# Altium PCB OpenRing-V1R0-MainBoard.PcbDoc (part 3 of 3)
Units mm, origin at the board's own origin, x right, y up, seen from the top; angles counter-clockwise.
Board outline 50.5 x 8.5 mm, 4 copper layers (Top Layer, Layer 1, Layer 2, Bottom Layer), stack 0.148 mm thick; 74 components, 58 nets, 273 pads, 106 vias.
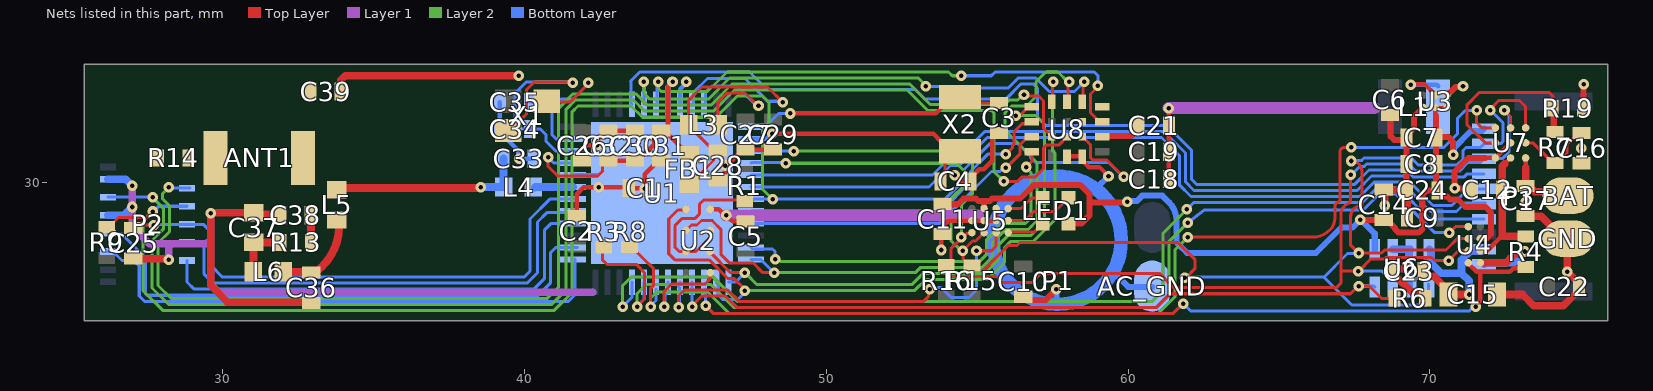
[diagram p4: the nets of this part, all layers, seen from the top]

## Via types
v1: diameter 0.35, hole 0.15, Top Layer to Bottom Layer, tented both sides, 106 vias

## Nets (pads, with @x,y where several pads share a name; then routed paths per layer and width w, separated by ;. In a path a pad name is that pad's centre, name@x,y a point inside that pad or via, vN(x,y) a via of type N, cw(c..) or ccw(c..) an arc to the next point about the centre after c; other vN are vias at no path point) (continued)
CHG_IRQ: R3.2 U1.20 U4.A1 | length 35.7
  Top Layer w0.1: R3.2@42.625,27.875 42.575,27.825 42.575,27.425 42.725,27.275 43.7,27.275 43.975,27 43.975,26.135 43.725,25.885 v1(43.725,25.875) ; v1(70.65,28.325) 70.85,28.525 U4.A1@71.275,28.525
  Layer 2 w0.1: v1(43.725,25.875) 43.725,26.3 44.025,26.6 46.175,26.6 46.925,25.85 60.925,25.85 61.35,26.275 61.35,28.025 v1(61.975,28.65)
  Bottom Layer w0.1: v1(43.725,25.875) v1@43.725,25.885 ; v1@43.725,25.9 43.74,25.9 43.95,26.11 U1.20@43.95,26.685 ; v1@61.977,28.652 62.516,29.075 62.551,29.075 67.791,29.075 67.82,29.104 68.316,29.6 68.885,29.6 70.16,28.325 v1(70.65,28.325)
GAUGE_IRQ: R8.2 U1.19 U7.A1 | length 37.4
  Top Layer w0.1: R8.2@43.535,27.865 43.9,27.5 44.275,27.125 44.275,26.584 44.175,26.484 v1(44.175,25.875) ; v1(61.975,28.175) 66.107,28.175 ccw(c66.108,29) 66.691,28.417 ccw(c66.308,28.8) 66.85,28.798 66.85,28.8 66.85,29.175 cw(c67.025,29.175) 66.962,29.338 ccw(c66.925,29.431) 67.015,29.388 67.025,29.409 67.025,31 cw(c67.175,31) 67.175,31.15 v1(67.4,31.15) ; v1@71.55,32.35 71.55,31.975 71.725,31.8 U7.A1@72.175,31.8 U7.A1@72.2,31.8
  Layer 2 w0.1: v1(44.175,25.875) 44.175,26.175 ; 44.2,26.175 44.375,26.35 46.075,26.35 46.775,25.65 61.008,25.65 61.55,26.192 61.55,27.75 v1(61.975,28.175)
  Bottom Layer w0.1: v1@44.192,25.892 v1(44.175,25.875) 44.175,25.9 44.35,26.075 U1.19@44.35,26.45 ; v1@67.39,31.15 v1(67.4,31.15) 70.462,31.15 70.925,31.613 70.925,32.125 71.175,32.375 v1(71.55,32.375)
GND: AC_GND.1 C1.2 C2.2 C3.2 C4.1 C5.1 C6.2 C7.1 C8.2 C9.2 C10.1 C11.2 C12.2 C14.1 C15.1 C16.2 C17.2 C18.1 C19.1 C21.2 C22.1 C23.1 C24.2 C25.1 C26.2 C27.2 C28.1 C29.2 C30.1 C31.1 C32.1 C33.2 C34.1 C35.1 C36.1 C37.1 C38.1 C39.2 GND.1 P1.2 P2.7 P2.11 P3.10 R6.1 R19.2 U1.32 U1.44 U1.49 U2.D1 U3.A1 U3.C2 U4.D2 U5.A3 U5.B1 U5.B2 U5.B3 U6.2 U6.3 U6.6 U7.B2 U7.C1 U8.6 U8.7 | length 106.8
  Top Layer w0.1: C16.2@75.025,30.625 v1@75.025,31.075
  Top Layer w0.15: C2.2@41.725,28.875 41.725,29.6 41.95,29.825 v1(42.45,29.825) 43.425,29.825 C1.2@43.45,29.8 v1@43.925,29.8 ; C26.2@41.9,30.71 41.9,31.125 42,31.225 v1(42.4,31.225) 42.438,31.263 42.438,31.473 42.65,31.685 C32.1@42.65,31.7 ; C32.1@42.76,31.71 C30.1@43.65,31.71 ; v1@43.975,29.8 43.975,30.26 44.425,30.71 C31.1@44.525,30.71 ; U2.D1@46.15,29.1 46.437,29.1 46.637,28.9 v1(46.675,28.9) 46.69,28.9 46.89,28.7 C5.1@47.275,28.7 ; C28.1@46.4,30.05 46.5,30.05 46.625,30.175 46.625,30.475 47.125,30.975 C27.2@47.125,31 ; C27.2@47.3,31.075 C27.2@47.313,31.088 ; C27.2@47.3,31.1 C27.2@47.313,31.088 ; C27.2@47.325,31.1 C27.2@47.313,31.088 ; C29.2@48.225,31.075 C27.2@47.325,31.075 C27.2@47.313,31.088 ; v1(53.8,27.75) 53.8,28.175 53.9,28.275 53.9,28.575 54.05,28.725 U5.B1@54.825,28.725 U5.B2@55.225,28.725 U5.B3@55.6,28.725 ; v1@54.25,30.275 54.25,30.231 54.456,30.025 C4.1@54.775,30.025 54.775,30.125 55.071,30.421 55.219,30.421 55.5,30.703 55.5,31.662 55.588,31.75 C3.2@55.703,31.75 ; U5.B3@55.625,28.725 U5.A3@55.625,29.125 ; U8.6@57.975,30.862 58.475,30.862 U8.7@58.475,30.837 58.475,30.724 58.7,30.5 59.05,30.5 v1(59.35,30.2) ; C18.1@61.35,30.1 C19.1@61.35,31 C21.2@61.35,31.875 v1(61.35,32.45) ; 71.85,30.8 U7.C1@72.175,30.8 ; U7.C1@72.2,30.825 U7.B2@72.675,31.3
  Top Layer w0.2: C10.1@56.525,26.1 57.275,26.1 v1(57.625,26.45) ; C6.2@68.7,32.075 68.7,31.517 68.817,31.4 C7.1@69.225,31.4 ; C24.2@69.225,29.75 C8.2@69.225,30.6 C7.1@69.225,31.4 ; U3.A1@69.775,32.475 69.775,32.461 69.475,32.161 69.475,31.792 69.358,31.675 69.325,31.675 69.225,31.575 C7.1@69.225,31.475 C7.1@69.225,31.4 ; U3.C2@70.575,32.875 70.846,33.146 71.071,33.146 v1(71.1,33.175) ; v1(70.825,29.8) 70.825,30.35 71.275,30.8 71.85,30.8 ; v1@70.832,29.793 71.3,29.793 C12.2@71.332,29.793 ; R19.2@75.085,32.45 75.092,32.457 75.092,33.242 v1(75.1,33.25)
  Top Layer w0.25: C25.1@27.025,27.475 27.037,27.463 28.135,27.463 28.173,27.425 v1(28.2,27.425) ; C38.1@31.9,28.9 31.86,28.94 31.035,28.94 30.997,28.978 29.603,28.978 v1(29.6,28.975) 29.6,26.575 30.15,26.025 32.9,26.025 C36.1@32.925,26 ; C39.2@33.9,33 33.9,33.379 34.046,33.525 v1(39.8,33.525) ; C14.1@68.475,29.75 68.475,29.7 68.5,29.675 v1(68.5,29.225) ; C14.1@68.587,29.737 68.69,29.737 68.781,29.737 C24.2@69.25,29.737 ; C23.1@68.725,27.15 68.744,27.131 69.281,27.131 v1(69.3,27.15) ; C23.1@68.823,26.927 68.875,26.875 69.1,26.65 69.123,26.65 69.473,26.3 69.775,26.3 69.85,26.225 R6.1@69.85,26.15 ; C9.2@69.25,28.825 C24.2@69.25,29.725 ; U4.D2@71.675,27.325 72.529,27.325 72.675,27.471 72.675,27.473 72.807,27.605 73.028,27.605 73.123,27.7 v1(73.15,27.7) ; C15.1@72.225,26.275 73.075,26.275 73.45,25.9 74.425,25.9 74.95,26.425 C22.1@74.95,26.525 ; C17.2@73.175,28.875 v1@73.175,29.325 ; C17.2@73.25,28.875 73.7,28.875 74.45,28.125 GND.1@74.525,28.125 ; GND.1@74.55,28.1 v1(74.55,27.025) C22.1@75,26.575
  Layer 1 w0.25: v1(27,29.875) v1(27,29.175) 27,28.5 27.55,27.95 28.2,27.95 ; v1(28.2,27.425) 28.2,27.95 ; v1(29.6,28.975) 29.6,28.096 ; 42.25,26.35 29.85,26.35 29.6,26.6 29.6,28.096 ; 28.2,27.95 29.454,27.95 29.6,28.096
  Layer 1 w0.4: v1(46.675,28.9) 55.025,28.9 ; v1@61.348,32.45 v1(61.35,32.45) 68.173,32.45
  Bottom Layer w0.15: C34.1@39.175,31.76 39.175,31.66 39.787,31.048 39.787,30.813 v1(39.825,30.775) C33.2@40.3,30.775 ; C34.1@39.175,31.825 C35.1@39.175,32.65 ; U1.32@41.6,30.235 42.415,30.235 U1.49@42.425,30.225 ; U1.44@45.15,32.585 45.15,33.08 45.35,33.28 v1@45.35,33.3
  Bottom Layer w0.2: 57.6,25.9 57.625,25.925 57.625,25.95 v1(57.625,26.45) ; v1(59.35,30.2) 58.967,29.817 58.967,29.743 58.967,29.651 59.4,29.218 ; 59.55,26.975 60,26.525 AC_GND.1@60.8,26.525
  Bottom Layer w0.25: P2.7@26.19,28.9 26.709,28.9 26.984,29.175 v1(27,29.175) ; P2.11@26.19,30.1 26.775,30.1 v1@26.975,29.9 ; U6.2@68.775,27.77 69.345,27.77 U6.3@69.35,27.775 ; v1@69.3,27.177 v1(69.3,27.15) 69.319,27.131 v1@69.319,27.102 ; U6.6@69.325,26.525 v1@69.325,27.047 ; v1@69.325,27.252 U6.3@69.325,27.75 ; P3.10@71.8,27.275 71.85,27.325 72.775,27.325 v1(73.15,27.7)
  other v1: 73.175,29.35 43.975,29.775 54.25,30.225 46.65,30.55 75.025,31.125 45.35,33.325
LED_EN: U1.17 U5.C3 | length 14.2
  Top Layer w0.1: v1(45.1,25.85) 45.1,26.225 45.3,26.425 46.733,26.425 47.108,26.05 53.225,26.05 53.377,26.202 53.377,26.402 v1(53.425,26.45) ; v1(54.975,27.725) 55.475,27.725 55.625,27.875 U5.C3@55.625,28.325
  Bottom Layer w0.1: v1(45.1,25.85) 45.125,25.875 45.125,26.5 U1.17@45.1,26.525 ; U1.17@45.125,26.66 U1.17@45.15,26.685 ; v1(53.425,26.45) 53.473,26.498 53.689,26.498 53.7,26.509 53.8,26.509 54.134,26.175 54.725,26.175 54.975,26.425 v1(54.975,27.725)
MCU_R\E\S\E\T\: C25.2 P2.6 U1.30 | length 18.1
  Top Layer w0.1: C25.2@27.025,28.4 27.2,28.575 v1(27.7,28.575)
  Bottom Layer w0.1: v1(27.7,28.575) 27.713,28.588 28.798,28.588 P2.6@28.81,28.6 29.35,28.6 29.575,28.375 29.575,27.258 29.983,26.85 39.975,26.85 40.175,27.05 40.175,28.775 40.835,29.435 U1.30@41.6,29.435
MCU_RX: P2.2 U1.28 | length 15.4
  Bottom Layer w0.1: P2.2@28.81,27.4 28.81,26.69 29.05,26.45 40.3,26.45 40.65,26.8 40.65,28.4 40.885,28.635 U1.28@41.6,28.635
MCU_SWD_CLK: P2.5 U1.26 | length 18.3
  Bottom Layer w0.1: P2.5@26.19,28.3 26.625,28.3 27.425,27.5 27.425,26.309 27.484,26.25 40.45,26.25 40.85,26.65 40.85,27.65 41.025,27.825 U1.26@41.75,27.825
MCU_SWD_IO: P2.3 U1.25 | length 18
  Bottom Layer w0.1: P2.3@26.19,27.7 26.35,27.7 26.65,27.4 26.874,27.4 27.049,27.4 27.225,27.224 27.225,27.049 27.225,26.226 27.401,26.05 41.45,26.05 41.675,26.275 U1.25@41.675,27.45
MCU_TX: P2.4 U1.29 | length 15.9
  Bottom Layer w0.1: P2.4@28.81,28 29.25,28 29.375,27.875 29.375,26.95 29.675,26.65 40.075,26.65 40.425,27 40.425,28.675 40.75,29 U1.29@41.625,29
MEM_SPI_C\S\: U1.18 U2.A1 | length 3.3
  Top Layer w0.1: v1(44.625,25.875) 44.625,26.375 44.875,26.625 45.975,26.625 46.135,26.785 46.135,26.96 U2.A1@46.175,27
  Bottom Layer w0.1: v1(44.625,25.875) 44.642,25.892 44.642,26.252 44.75,26.36 U1.18@44.75,26.685
MPU_CLK: U1.12 U2.C2 U8.13 | length 22.7
  Top Layer w0.1: U2.C2@45.35,28.4 45.527,28.577 45.71,28.577 45.858,28.725 46.225,28.725 46.225,28.714 46.5,28.439 46.5,27.605 46.78,27.325 47.57,27.325 47.895,27 v1(48.275,27) ; U8.13@57.975,32.687 58.013,32.724 58.013,33.288 v1(58.05,33.325)
  Layer 2 w0.1: v1(48.275,27) 52.95,27 53.125,27.175 55.167,27.175 55.5,27.508 55.5,27.992 55.933,28.425 56.683,28.425 56.984,28.726 56.984,30.651 55.925,31.71 55.925,32.31 56.14,32.525 56.635,32.525 56.95,32.84 56.95,33.325 57.275,33.65 57.675,33.65 58,33.325 v1(58.05,33.325)
  Bottom Layer w0.1: U1.12@47.5,27.435 47.825,27.435 48.26,27 v1(48.275,27)
MPU_CS#: U1.41 U8.12 | length 17.4
  Top Layer w0.1: U8.12@58.475,32.687 58.512,32.724 58.512,33.288 v1(58.55,33.325)
  Layer 2 w0.1: v1(43.95,33.325) 43.95,32.95 44.15,32.75 46.092,32.75 46.792,33.45 46.808,33.45 53.045,33.45 53.3,33.195 v1(53.3,33.175)
  Bottom Layer w0.1: U1.41@43.95,32.585 v1@43.95,33.4 ; v1(53.3,33.175) 53.8,33.175 53.85,33.125 56.033,33.125 56.358,33.45 56.94,33.45 57.39,33 58.225,33 v1(58.55,33.325)
MPU_GPIO0: U1.8 U8.2 | length 11
  Top Layer w0.1: v1(55.95,30.925) 56.173,31.148 56.173,31.223 56.225,31.275 56.225,31.675 56.485,31.935 56.76,31.935 U8.2@56.775,31.95 ; U8.2@56.775,32.025 U8.2@56.812,32.025
  Bottom Layer w0.1: U1.8@47.5,29.035 53.802,29.035 54.775,30.008 54.775,30.35 55.35,30.925 v1(55.95,30.925)
MPU_GPIO1: U1.9 U8.3 | length 10.7
  Top Layer w0.1: v1(55.95,30.475) 55.96,30.475 56.425,30.94 56.425,31.25 56.7,31.525 U8.3@56.812,31.525
  Bottom Layer w0.1: U1.9@47.5,28.635 53.76,28.635 55.475,30.35 55.757,30.35 55.882,30.475 v1(55.95,30.475)
MPU_GPIO2: U1.42 U8.10 | length 17.9
  Top Layer w0.1: v1(59,33.2) 59,33.169 58.751,32.919 58.751,32.3 59.026,32.025 U8.10@59.138,32.025
  Layer 2 w0.1: v1(44.425,33.325) 44.442,33.308 44.442,33.083 44.525,33 46.059,33 46.709,33.65 46.725,33.65 54.05,33.65 54.175,33.525 v1(54.475,33.525)
  Bottom Layer w0.1: U1.42@44.35,32.585 44.387,32.623 44.387,33.338 v1@44.425,33.375 ; v1(54.475,33.525) 55.467,33.525 55.592,33.65 58.875,33.65 59,33.525 v1(59,33.2)
MPU_GPIO3: U8.11
MPU_GPIO4: U8.18
MPU_IRQ#: U1.11 U8.4 | length 12.9
  Top Layer w0.1: v1(56.625,30.5) 56.812,30.688 U8.4@56.812,31.025
  Layer 2 w0.1: v1(48.3,27.45) 48.348,27.402 48.456,27.402 48.484,27.375 55.085,27.375 55.3,27.59 55.3,28.075 55.85,28.625 56.175,28.625 56.6,28.625 56.784,28.809 56.784,30.316 56.625,30.475 v1(56.625,30.5)
  Bottom Layer w0.1: U1.11@47.5,27.835 47.55,27.785 48.215,27.785 48.295,27.705 48.295,27.455 v1(48.3,27.45) ; v1@56.6,30.525 v1(56.625,30.5)
MPU_MISO: U1.13 U2.B1 U8.1 | length 18.3
  Top Layer w0.1: U2.B1@46.15,27.7 46.15,27.672 46.822,27 v1(47.3,27) ; v1(56.275,32.2) 56.323,32.248 56.447,32.248 56.7,32.5 U8.1@56.787,32.5
  Layer 2 w0.1: v1@47.3,26.975 47.325,26.975 47.7,26.6 52.833,26.6 53.208,26.975 55.25,26.975 55.7,27.425 55.7,27.909 56.016,28.225 56.341,28.225 56.766,28.225 57.225,28.684 57.225,29.108 57.225,31.925 56.95,32.2 v1(56.275,32.2)
  Bottom Layer w0.1: U1.13@46.75,26.685 46.985,26.685 v1(47.3,27)
MPU_MOSI: U1.14 U2.D2 U8.14 | length 23.3
  Top Layer w0.1: U2.D2@45.35,29.125 45.3,29.075 45.075,29.075 44.775,28.775 44.775,27.625 44.975,27.425 46.114,27.425 46.739,26.8 46.95,26.8 47.3,26.45 v1(47.3,26.4) ; U8.14@57.475,32.687 57.5,32.712 57.5,33.3 v1(57.525,33.325)
  Layer 2 w0.1: v1(47.3,26.4) 52.915,26.4 53.29,26.775 55.333,26.775 55.9,27.342 55.9,27.826 56.099,28.025 56.849,28.025 57.575,28.751 57.575,30.967 57.5,31.042 57.5,33.3 v1(57.525,33.325)
  Bottom Layer w0.1: U1.14@46.35,26.685 46.4,26.635 46.4,26.275 46.565,26.11 47.06,26.11 47.3,26.35 v1(47.3,26.4)
MPU_R\E\S\E\T\: P2.8 R9.2 U1.7 U8.17 | length 53
  Top Layer w0.1: R9.2@26.15,28.51 26.225,28.51 26.54,28.825 27.44,28.825 27.64,29.025 v1(27.675,29.025) ; U8.17@58.475,31.525 58.75,31.25 58.75,30.813 58.838,30.725 59.3,30.725 v1(59.85,30.175)
  Layer 2 w0.1: v1(27.675,29.025) 27.35,28.7 27.35,26.4 28,25.75 40.983,25.75 41.575,26.342 41.575,32.335 41.765,32.525 43.526,32.525 43.901,32.15 46.34,32.15 47.04,32.85 47.885,32.85 48.1,32.635 48.1,31.96 47.875,31.735 47.875,29.775 v1(48.225,29.425)
  Bottom Layer w0.1: v1(27.675,29.025) 27.7,29.025 27.875,29.2 P2.8@28.8,29.2 ; U1.7@47.5,29.435 47.549,29.386 47.597,29.435 53.92,29.435 54.385,29.9 54.575,30.09 54.575,30.433 55.417,31.275 56.36,31.275 56.76,30.875 56.76,30.825 56.935,30.65 59.36,30.65 59.835,30.175 v1(59.85,30.175)
MPU_SWD_CLK: P2.10 U8.15 | length 42.3
  Top Layer w0.1: v1(56.55,32.9) 56.598,32.852 57.034,32.852 57.2,32.687 57.2,32.425 ; 57.2,32.425 57.2,31.775 57.45,31.525 U8.15@57.475,31.525
  Layer 2 w0.1: v1(28.2,29.825) 28,29.625 28,29.442 28.225,29.217 28.225,28.358 27.85,27.983 27.85,26.575 28.275,26.15 40.75,26.15 41.125,26.525 41.125,32.45 41.6,32.925 43.692,32.925 44.067,32.55 46.175,32.55 46.875,33.25 52.765,33.25 53.44,32.575 55.908,32.575 56.058,32.725 56.341,32.725 56.516,32.9 v1(56.55,32.9)
  Bottom Layer w0.1: v1(28.2,29.825) 28.212,29.813 28.887,29.813 P2.10@28.9,29.8
MPU_SWD_DIO: P2.9 U8.16 | length 45.5
  Top Layer w0.1: v1(55.875,30.025) 56.34,30.025 56.49,30.175 56.925,30.175 57.2,30.45 57.2,31.136 57.288,31.225 57.7,31.225 U8.16@57.975,31.5
  Layer 2 w0.1: v1(27.675,29.5) 27.675,29.485 28.025,29.135 28.025,28.44 27.65,28.065 27.65,26.492 28.192,25.95 40.9,25.95 41.375,26.425 41.375,32.417 41.683,32.725 43.609,32.725 43.984,32.35 46.258,32.35 46.958,33.05 52.683,33.05 53.358,32.375 55.475,32.375 55.55,32.3 55.55,30.35 v1(55.875,30.025)
  Bottom Layer w0.1: P2.9@26.19,29.5 v1(27.675,29.5)
NetANT1_1: ANT1.1 C38.2 C39.1 R13.2 R14.1 | length 0.9
  Top Layer w0.265: R13.2@32.9,27.975 32.91,27.985 32.91,28.89 C38.2@32.9,28.9
NetANT1_2: ANT1.2 R14.2
NetC3_1: C3.1 U1.1 X2.2 | length 8.8
  Top Layer w0.1: X2.2@54.425,32.825 54.625,32.625 C3.1@55.831,32.625
  Top Layer w0.15: v1(48.8,32.275) 53.625,32.275 53.8,32.45 53.8,32.5 54,32.7 54.05,32.7 X2.2@54.05,33.075
  Bottom Layer w0.1: U1.1@47.5,31.835 47.975,31.835 48.415,32.275 v1(48.8,32.275)
NetC4_2: C4.2 U1.2 X2.1 | length 7.3
  Top Layer w0.1: C4.2@53.775,30.025 53.925,30.175 53.925,30.775 X2.1@53.875,30.825
  Top Layer w0.15: v1(48.2,31.6) 53.55,31.6 X2.1@53.775,31.375
  Bottom Layer w0.15: U1.2@47.5,31.435 48.02,31.435 48.185,31.6 v1(48.2,31.6)
NetC16_1: C16.1 R7.2 U7.B3 | length 2.7
  Top Layer w0.1: U7.B3@73.175,31.3 73.415,31.3 74.09,30.625 R7.2@74.15,30.625 ; R7.2@74.15,30.64 74.225,30.64 74.55,30.965 74.55,31.25 74.95,31.65 C16.1@75.025,31.65
NetC21_1: C21.1 U8.9 | length 1.2
  Top Layer w0.2: U8.9@59.138,31.525 60.1,31.525 60.25,31.675 C21.1@60.25,31.75
NetC28_2: C28.2 FB1.2 L3.1 U1.45 | length 10.9
  Top Layer w0.1: FB1.2@45.45,29.935 45.48,29.935 46.258,30.713 46.258,31.108 C28.2@46.275,31.125 ; C28.2@46.275,31.175 46.13,31.175 45.435,31.87 L3.1@45.435,31.9 45.435,32.71 45.875,33.15 48.05,33.15 v1(48.55,32.65)
  Bottom Layer w0.1: U1.45@45.55,32.585 45.6,32.635 45.6,32.975 46.06,33.435 47.3,33.435 48.055,32.68 48.52,32.68 v1(48.55,32.65)
NetC30_2: C30.2 C31.2 C32.2 FB1.1 U1.33 U1.43 | length 9.6
  Top Layer w0.1: v1(40.775,30.825) 40.775,30.525 41.1,30.2 42.425,30.2 42.575,30.35 42.575,30.56 42.715,30.7 C32.2@42.8,30.7
  Top Layer w0.15: C32.2@42.8,30.71 43.75,30.71 44.3,31.26 44.3,31.585 44.415,31.7 C31.2@44.425,31.7 ; C31.2@44.68,31.655 44.75,31.585 45.42,30.915 FB1.1@45.45,30.915 ; C31.2@44.725,31.7 44.75,31.725 44.75,33.171 44.9,33.321 v1@44.9,33.375
  Bottom Layer w0.1: v1(40.775,30.825) 40.965,30.635 U1.33@41.6,30.635
  Bottom Layer w0.15: U1.43@44.75,32.585 44.75,33.171 44.9,33.321 v1@44.9,33.375
  other v1: 44.9,33.325
NetC33_1: C33.1 L4.2 L5.1 | length 6.5
  Top Layer w0.265: L5.1@33.775,29.85 33.816,29.809 38.534,29.809 v1(38.55,29.825)
  Bottom Layer w0.265: v1(38.55,29.825) 38.555,29.83 L4.2@39.305,29.83 ; C33.1@39.3,30.775 39.305,30.77 39.305,29.87 L4.2@39.325,29.85
NetC34_2: C34.2 U1.34 X1.3 | length 8.9
  Top Layer w0.1: X1.3@39.45,31.71 39.5,31.71 39.937,32.147 39.95,32.147 40.062,32.26 40.062,33.062 40.325,33.325 41.575,33.325 v1(41.6,33.3)
  Bottom Layer w0.1: v1(41.6,33.3) 41.575,33.325 40.06,33.325 39.675,32.94 39.675,31.9 39.815,31.76 C34.2@40.175,31.76 40.515,31.76 40.7,31.575 40.7,31.36 41.035,31.025 U1.34@41.65,31.025
NetC35_2: C35.2 U1.35 X1.1 | length 5.7
  Top Layer w0.1: X1.1@40.725,32.685 40.76,32.65 41.5,32.65 42.1,33.25 v1(42.1,33.3)
  Bottom Layer w0.1: C35.2@40.175,32.65 40.7,32.65 40.9,32.45 ; U1.35@41.6,31.435 41.04,31.435 40.9,31.575 40.9,32.45 ; v1(42.1,33.3) 42.1,33.25 41.601,32.751 41.201,32.751 40.9,32.45
NetC36_2: C36.2 L5.2 L6.1 | length 3.1
  Top Layer w0.265: L6.1@31.99,27.025 32.002,27.013 C36.2@32.925,27.013 ; C36.2@32.925,27 33.102,27.062 33.146,27.078 ccw(c31.97,28.545) 33.85,28.498 33.851,28.545 33.835,28.589 L5.2@33.775,28.76
NetC37_2: C37.2 L6.2 R13.1 | length 1.8
  Top Layer w0.265: L6.2@31.01,27.025 31.017,27.033 31.017,27.942 C37.2@31.025,27.95 ; C37.2@31.025,28 R13.1@31.9,28
NetL1_1: L1.1 U3.B2 | length 1.9
  Top Layer w0.15: v1@69.35,33.25 69.824,33.25 70.175,32.899 U3.B2@70.175,32.875
  Bottom Layer w0.15: v1(69.375,33.225) 70.225,33.225 L1.1@70.275,33.175
NetL3_2: L3.2 U1.46 | length 4.8
  Top Layer w0.1: L3.2@46.415,31.9 46.415,32.665 46.7,32.95 47.304,32.95 47.704,32.55 v1@47.725,32.55
  Bottom Layer w0.1: U1.46@45.95,32.585 46,32.635 46,32.975 46.21,33.185 47.035,33.185 47.67,32.55 v1@47.725,32.55
  other v1: 47.75,32.525
NetL4_1: L4.1 U1.31 | length 1.3
  Bottom Layer w0.265: L4.1@40.35,29.825 40.36,29.835 U1.31@41.6,29.835
NetLED1_2: LED1.2 U5.C4 | length 1.2
  Top Layer w0.1: U5.C4@56.025,28.325 56.05,28.35 56.9,28.35 57.125,28.575 LED1.2@57.15,28.575
NetLED1_3: LED1.3 U5.A4 | length 1.3
  Top Layer w0.1: U5.A4@56.025,29.125 56.45,29.125 56.8,29.475 LED1.3@57.175,29.475
NetLED1_4: LED1.4 U5.B4 | length 2.3
  Top Layer w0.1: U5.B4@56.025,28.725 56.57,28.725 56.87,29.025 57.575,29.025 LED1.4@58.025,29.475
NetR1_1: R1.1 U2.B2 U2.C1 | length 5.3
  Top Layer w0.1: U2.C1@46.15,28.4 46.15,28.175 45.675,27.7 45.125,27.7 44.975,27.85 44.975,28.55 45.225,28.8 45.65,28.8 45.788,28.938 45.788,29.263 45.925,29.4 R1.1@47.325,29.4
NetR7_1: R7.1 R19.1 U7.B1 | length 6.1
  Top Layer w0.1: U7.B1@72.175,31.3 71.835,31.3 71.225,31.91 71.225,32.55 71.65,32.975 73.95,32.975 74.075,32.85 R19.1@74.075,32.4
  Top Layer w0.2: R7.1@74.108,31.667 R19.1@74.108,32.4
PWR_I2C_SCL: P3.2 R15.2 U1.4 U4.B1 U5.C2 U6.5 U7.A3 | length 47.7
  Top Layer w0.1: R15.2@54.825,27.16 54.75,27.16 54.6,27.31 54.6,27.385 54.525,27.46 v1(54.525,27.725) 54.525,27.735 54.84,28.05 54.95,28.05 55.2,28.3 U5.C2@55.25,28.3 ; R15.2@54.9,27.075 55.2,27.075 56.025,27.9 56.315,27.9 56.415,28 61.65,28 62.225,27.425 62.225,27.14 61.91,26.825 v1(61.875,26.825) ; v1(67.4,30.7) cw(c67.4,30.35) 67.75,30.354 67.75,29.225 ccw(c67.75,28.85) 67.375,28.85 67.375,28.775 67.375,27.905 67.63,27.65 68.405,27.65 68.505,27.75 70.535,27.75 70.91,28.125 U4.B1@71.275,28.125 ; v1(72,32.375) 72,32.425 72.275,32.7 72.975,32.7 73.175,32.5 U7.A3@73.175,31.8
  Layer 2 w0.1: v1(48.65,30.625) 48.675,30.625 54.31,30.625 54.575,30.36 54.575,29.9 54.125,29.45 54.125,28.065 54.465,27.725 v1(54.525,27.725)
  Bottom Layer w0.1: U1.4@47.5,30.635 47.515,30.65 48.625,30.65 v1(48.65,30.625) ; v1(61.875,26.825) 61.9,26.85 66.49,26.85 ; v1(67.4,30.7) 67.412,30.712 67.731,30.712 67.819,30.8 69.382,30.8 69.607,30.575 70.91,30.575 71.1,30.765 71.1,31.05 71.2,31.15 71.675,31.15 P3.2@71.8,31.275 72.35,31.275 72.425,31.35 72.425,31.965 72.015,32.375 v1(72,32.375) ; v1@67.65,27.606 v1(67.65,27.65) 67.635,27.635 67.275,27.635 66.49,26.85 ; U6.5@69.95,26.625 69.95,26 69.875,25.925 67.415,25.925 66.49,26.85
PWR_I2C_SDA: P3.3 R16.2 U1.3 U4.C1 U5.C1 U6.7 U7.A2 | length 43.1
  Top Layer w0.1: R16.2@53.975,27.245 53.975,26.934 54.034,26.875 55.635,26.875 55.835,26.675 56.812,26.675 57.112,26.975 61.04,26.975 61.515,26.5 66.9,26.5 67.05,26.65 67.05,27.05 ; R16.2@54.125,27.095 54.125,27.788 54.475,28.138 v1(54.475,28.175) 54.531,28.175 54.659,28.303 54.803,28.303 U5.C1@54.825,28.325 ; v1(67.375,30.25) 67.375,29.377 67.371,29.363 cw(c67.275,29.393) 67.312,29.3 ccw(c67.46,28.917) 67.05,28.917 67.05,27.05 ; U4.C1@71.275,27.725 70.95,27.725 v1(70.625,27.4) 70.162,27.4 70.062,27.5 68.538,27.5 68.488,27.45 68.04,27.45 67.64,27.05 v1(67.625,27.05) 67.05,27.05 ; v1(72.475,32.375) 72.675,32.175 U7.A2@72.675,31.8
  Layer 2 w0.1: v1(48.925,31.025) 54.45,31.025 54.85,30.625 54.85,29.621 54.475,29.246 v1(54.475,28.175)
  Bottom Layer w0.1: U1.3@47.5,31.035 47.51,31.025 v1(48.925,31.025) ; v1(67.375,30.25) 67.41,30.25 67.672,30.512 67.814,30.512 67.902,30.6 69.299,30.6 69.524,30.375 70.992,30.375 71.267,30.65 71.675,30.65 P3.3@71.8,30.775 72.4,30.775 72.625,31 72.625,32.191 72.475,32.341 v1(72.475,32.375) ; v1(67.625,27.05) 68.415,27.05 68.715,26.75 U6.7@68.75,26.75
PWR_K\I\L\L\: R4.1 U1.15 U4.D1 | length 29.8
  Top Layer w0.1: v1(46,25.9) 46.25,25.65 48.125,25.65 61.5,25.65 v1(61.825,25.975)
  Top Layer w0.15: U4.D1@71.275,27.325 71.275,27.301 71.551,27.025 71.675,27.025 ; v1(71.525,25.875) 71.525,25.929 71.675,26.079 71.675,27.025 ; R4.1@73.125,27.175 73.087,27.137 72.765,27.137 72.653,27.025 71.675,27.025
  Bottom Layer w0.1: v1@45.975,25.925 v1(46,25.9) U1.15@46,26.45 ; U1.15@45.975,26.61 U1.15@46,26.635 ; v1(61.825,25.975) 62.075,25.725 71.307,25.725 71.457,25.875 v1(71.525,25.875)
SENSOR_GPIO_0: P3.4 U1.40 | length 32.6
  Bottom Layer w0.1: 43.508,33.342 43.815,33.65 47.45,33.65 48.025,33.075 52.94,33.075 53.265,32.75 55.94,32.75 56.44,33.25 56.858,33.25 57,33.108 57,32.15 57.275,31.875 61.275,31.875 ; 43.525,33.325 43.525,32.61 U1.40@43.55,32.585 ; 61.278,31.878 62.1,31.056 62.1,30.092 62.267,29.925 67.51,29.925 67.985,30.4 69.216,30.4 69.441,30.175 71.138,30.175 71.238,30.275 P3.4@71.8,30.275
SENSOR_GPIO_1: P3.5 U1.5 | length 27.1
  Bottom Layer w0.1: U1.5@47.5,30.235 53.518,30.235 54.033,30.75 54.326,30.75 55.251,31.675 61.192,31.675 61.9,30.967 61.9,30.009 62.184,29.725 67.592,29.725 68.067,30.2 69.133,30.2 70.108,29.225 70.725,29.225 71.275,29.775 P3.5@71.8,29.775
SENSOR_GPIO_2: P3.6 U1.6 | length 27.1
  Bottom Layer w0.1: U1.6@47.5,29.835 53.4,29.835 54.115,30.55 54.409,30.55 55.334,31.475 61.109,31.475 61.7,30.884 61.7,29.909 62.084,29.525 67.675,29.525 68.15,30 69.05,30 70.025,29.025 70.883,29.025 71.158,29.3 P3.6@71.85,29.3
SENSOR_GPIO_3: P3.7 U1.21 | length 33.7
  Layer 2 w0.1: v1(43.25,25.875) 43.25,26.575 43.525,26.85 46.25,26.85 47.05,26.05 60.8,26.05 61.15,26.4 61.15,28.3 v1(61.95,29.1)
  Bottom Layer w0.1: v1(43.25,25.875) 43.55,26.175 U1.21@43.55,26.685 ; v1(61.95,29.1) 62.175,29.325 67.758,29.325 68.233,29.8 68.967,29.8 69.992,28.775 P3.7@71.8,28.775
V_BAT: C12.1 R4.2 U4.C2 U7.C2 | length 4.4
  Top Layer w0.15: U4.C2@71.675,27.725 71.9,27.725 72.375,28.2 ; 72.475,30.6 U7.C2@72.675,30.8
  Top Layer w0.25: 72.475,30.6 72.4,30.525 C12.1@72.4,29.75 72.4,28.375 72.4,28.225 72.425,28.2 R4.2@73.175,28.2
V_BAT+: BAT.1 C17.1 U7.C3 | length 2.2
  Top Layer w0.15: 73.175,30.525 U7.C3@73.175,30.8
  Top Layer w0.25: C17.1@73.175,29.875 73.175,30.475 ; C17.1@73.325,29.825 73.475,29.675 74.425,29.675 BAT.1@74.55,29.55
V_REG_EN: R6.2 U1.16 U6.8 | length 25.4
  Top Layer w0.1: v1(45.55,25.875) 45.55,25.91 45.865,26.225 46.65,26.225 47.025,25.85 47.642,25.85 48.75,25.85 60.95,25.85 61.4,26.3 67.37,26.3 67.62,26.55 68,26.55 68.4,26.15 R6.2@68.825,26.15
  Layer 2 w0.1: v1(45.55,25.875) v1@45.55,25.91
  Bottom Layer w0.1: v1@45.525,25.875 v1@45.538,25.888 ; v1(45.55,25.875) U1.16@45.55,26.6 ; v1(67.65,26.55) 68.15,26.55 U6.8@68.175,26.525
V_REG_IO: C15.2 C23.2 P3.9 U6.4 | length 5.5
  Top Layer w0.25: C23.2@69.8,27.05 69.8,26.95 69.875,26.875 70.125,26.875 C15.2@70.525,26.475 ; C15.2@70.625,26.275 v1(71.3,26.275)
  Bottom Layer w0.25: U6.4@69.975,27.77 70.027,27.717 70.027,27.323 70.375,26.975 71.05,26.975 ; v1(71.3,26.275) 71.3,26.725 71.05,26.975 ; P3.9@71.8,27.775 71.75,27.725 71.357,27.725 71.05,27.418 71.05,26.975
V_SYS: C7.2 C8.1 C11.1 C14.2 C24.1 LED1.1 P3.1 U3.B1 U3.C1 U4.B2 U5.A2 U6.1 | length 31.8
  Top Layer w0.1: U3.B1@70.175,32.475 U3.C1@70.55,32.475
  Top Layer w0.15: 70.175,32.25 U3.B1@70.175,32.475
  Top Layer w0.2: C11.1@53.9,29.275 54.375,29.275 54.55,29.45 54.96,29.45 55.035,29.375 55.225,29.375 ; U5.A2@55.225,29.125 55.225,29.375 ; LED1.1@58.025,28.625 58.45,28.625 58.725,28.9 58.725,29.325 ; v1(59.975,29.35) 59.95,29.325 58.725,29.325 ; v1(67.7,28.75) C14.2@68.475,28.75 68.55,28.75 68.562,28.763 68.85,28.475 68.85,28.442 68.967,28.325 69.633,28.325 69.75,28.442 69.75,29.575 69.9,29.725 C24.1@70.25,29.725 ; C24.1@70.2,29.827 C7.2@70.2,31.475 ; C7.2@70.2,31.5 70.2,32.2 ; C24.1@70.25,29.575 70.3,29.525 70.57,29.525 70.67,29.425 70.934,29.425 71.184,29.175 71.85,29.175 72.025,29 72.025,28.275 71.885,28.135 71.685,28.135 U4.B2@71.675,28.125 ; C7.2@70.25,31.5 70.605,31.5 70.775,31.33 v1(70.775,30.9) ; 55.225,29.375 55.415,29.375 55.49,29.45 56.417,29.45 56.867,29.9 58.425,29.9 58.725,29.6 58.725,29.325
  Bottom Layer w0.2: v1(59.975,29.35) 60.004,29.379 60.297,29.379 60.469,29.55 61.131,29.55 61.366,29.316 cw(c60.8,28.75) 61.6,28.75 61.6,28.02 61.659,27.946 61.955,27.65 66.225,27.65 67.071,28.496 67.441,28.496 67.694,28.75 67.717,28.75 68.175,28.292 U6.1@68.175,27.77 ; v1(70.775,30.9) 70.804,30.929 70.804,31.138 71.366,31.7 71.725,31.7 P3.1@71.8,31.775
pads on no net: P2.P1 P2.P2 P3.0 U1.23 U1.24 U1.27 U1.37 U1.38 U1.39 U5.A1 U8.19 U8.20 X1.2 X1.4

## Polygon pours and split planes (outlines as drawn)
GND on Layer 1 "GND_L02_P002" (solid, pour order 2): 53.5,33.5 61.5,33.5 61.5,25.75 53.5,25.75
GND on Layer 1 "GND_L02_P003" (solid, pour order 3): 39.5,34 48,34 48,25 39.5,25
GND on Layer 1 "GND_L02_P000" (solid, remove dead copper, pour order 0): 68,33.5 75.5,33.5 75.5,26.5 68,26.5
1V8 on Layer 2 "1V8_L03_P001" (solid, remove dead copper, pour order 1): 68,33.5 75.5,33.5 75.5,26.5 68,26.5

## Other copper
Top Layer:
  region net NetANT1_1: 33.15,28.9 33.15,33.4 25.65,33.4 25.65,30.3 28.25,30.3 28.25,31.1 26.45,31.1 26.45,32.6 32.65,32.6 32.65,28.9
  region net NetANT1_2: 28.75,30.3 29.95,30.3 29.95,31.1 28.75,31.1

## Silkscreen, mask and mechanical layers (free items; w line width, h text height)
Top Overlay:
  circle w0.25: c75.5,30.125 r0.056
Bottom Overlay:
  text "1" at 70.925,31.2 h1 r90
  text "+" at 62.675,28.158 h1
  text "AC" at 64.25,27.15 h1
  text "-" at 62.75,26.15 h1
  text "1" at 26.625,25.925 h1 r90
Mechanical 1:
  the board outline again, w0.1
Top Assembly:
  lines w0.1: 25.4,24.3 25.4,34.3 ; 33.9,24.5 33.9,35.9 ; 39.4,25 39.4,36 ; 47.9,25 47.9,35.3 ; 53.4,23.8 53.4,34.9 ; 61.9,24 61.9,34 ; 67.4,24 67.4,34 ; 75.9,23.4 75.9,33.4

## Dimensions
75.9,25.4 to 75.9,33.9 on Top Assembly
47.9,35.3 to 53.4,34.9 on Top Assembly
33.9,35.9 to 39.4,36 on Top Assembly
39.4,25 to 47.9,25 on Top Assembly
25.4,24.3 to 33.9,24.5 on Top Assembly
25.4,34.3 to 75.9,33.4 on Top Assembly
61.9,34 to 67.4,34 on Top Assembly
61.9,24 to 53.4,23.8 on Top Assembly
67.4,24 to 75.9,23.4 on Top Assembly